# EAGLE board Car.job (EAGLE 6.1)
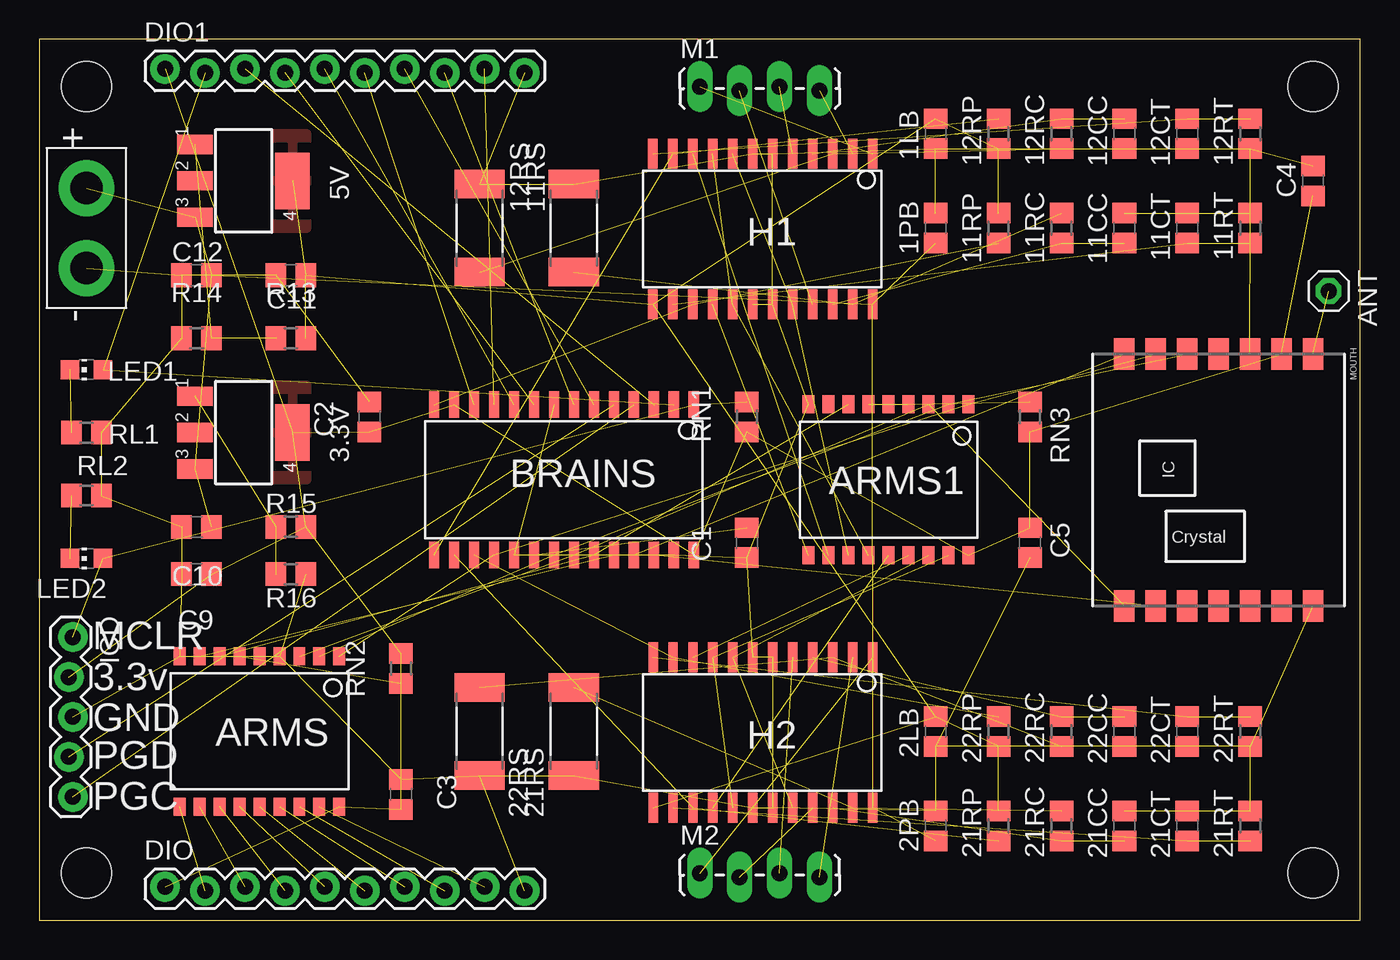
[diagram p0: board, top side]

Size 84 x 56 mm. Coordinates in mm from the lower left corner, seen from the top.
Outline: 0,0 84,0 84,56 0,56 0,0
Copper layers (1*16): Top 0.035mm / dielectric 1.5mm / Bottom 0.035mm
Design rules: minimum track width 8mil, minimum drill 20mil, track to track 10mil, track to pad 10mil, pad to pad 10mil, via to via 10mil, smd to smd 10mil, copper to edge 10mil, drill to drill 8mil, minimum pad ring 12mil, minimum via ring 10mil, stop-mask expansion 3mil, vias tented up to drill 25mil, thermal gap 25mil
Net classes: 1 power: width 0.508 mm, clearance 0.254 mm
Holes 3.2 mm at 3,53 3,3 81,53 81,3
tRestrict: area 11.2,43.4 to 14.8,50.6; area 11.2,27.4 to 14.8,34.6
vRestrict: area 67,20 to 83,36; area 11,28 to 17,34; area 11,44 to 17,50

## Footprints (pad centres in the part's own frame; a part is rotated, then mirrored left to right if it is on the bottom)
C0805 = smd 1.3 x 1.5: 1 -0.95,0; 2 0.95,0
SOT223 = smd 1.219 x 2.235: 1 -2.311,-3.099; 2 0,-3.099; 3 2.311,-3.099 | smd 3.6 x 2.2: 4 0,3.099
R0805 = smd 1.3 x 1.5: 1 -0.95,0; 2 0.95,0
R2512 = smd 1.8 x 3.2: 1 -2.8,0; 2 2.8,0
1X01 = drill 1.016 octagon: 1 0,0
SO-18W = smd 0.762 x 1.143: 1 -5.08,-4.788; 2 -3.81,-4.788; 3 -2.54,-4.788; 4 -1.27,-4.788; 5 0,-4.788; 6 1.27,-4.788; 7 2.54,-4.788; 8 3.81,-4.788; 9 5.08,-4.788; 10 5.08,4.788; 11 3.81,4.788; 12 2.54,4.788; 13 1.27,4.788; 14 0,4.788; 15 -1.27,4.788; 16 -2.54,4.788; 17 -3.81,4.788; 18 -5.08,4.788
SO28W = smd 0.65 x 1.7: 1 -7.62,-4.78; 2 -6.35,-4.78; 3 -5.08,-4.78; 4 -3.81,-4.78; 5 -2.54,-4.78; 6 -1.27,-4.78; 7 0,-4.78; 8 1.27,-4.78; 9 2.54,-4.78; 10 3.81,-4.78; 11 5.08,-4.78; 12 6.35,-4.78; 13 7.62,-4.78; 14 8.89,-4.78; 15 8.89,4.78; 16 7.62,4.78; 17 6.35,4.78; 18 5.08,4.78; 19 3.81,4.78; 20 2.54,4.78; 21 1.27,4.78; 22 0,4.78; 23 -1.27,4.78; 24 -2.54,4.78; 25 -3.81,4.78; 26 -5.08,4.78; 27 -6.35,4.78; 28 -7.62,4.78
1X10_LOCK = drill 1.016 pad 1.88: 1 0,0.127; 2 2.54,-0.127; 3 5.08,0.127; 4 7.62,-0.127; 5 10.16,0.127; 6 12.7,-0.127; 7 15.24,0.127; 8 17.78,-0.127; 9 20.32,0.127; 10 22.86,-0.127
SOP24L = smd 0.6 x 1.9: 1 -6.986,-4.717; 2 -5.716,-4.717; 3 -4.446,-4.717; 4 -3.176,-4.717; 5 -1.906,-4.717; 6 -0.636,-4.717; 7 0.634,-4.717; 8 1.904,-4.717; 9 3.174,-4.717; 10 4.444,-4.717; 11 5.714,-4.717; 12 6.984,-4.717; 13 6.984,4.843; 14 5.714,4.843; 15 4.444,4.843; 16 3.174,4.843; 17 1.904,4.843; 18 0.634,4.843; 19 -0.636,4.843; 20 -1.906,4.843; 21 -3.176,4.843; 22 -4.446,4.843; 23 -5.716,4.843; 24 -6.986,4.843
1X05_LOCK = drill 1.016 pad 1.88: 1 0,0.127; 2 2.54,-0.127; 3 5.08,0.127; 4 7.62,-0.127; 5 10.16,0.127
CHIP-LED0805 = smd 1.2 x 1.2: A 0,-1.05; C 0,1.05
1X04_LOCK_LONGPADS = drill 1.016 long: 1 0,0; 2 2.54,-0.254; 3 5.08,0; 4 7.62,-0.254
RFM12-XXX-S2 = smd 2 x 1.3: 1 -8.01,6.01; 2 -8.01,4.01; 3 -8.01,2.01; 4 -8.01,0.01; 5 -8.01,-1.99; 6 -8.01,-3.99; 7 -8.01,-5.99; 8 7.99,-5.99; 9 7.99,-3.99; 10 7.99,-1.99; 11 7.99,0.01; 12 7.99,2.01; 13 7.99,4.01; 14 7.99,6.01
1X02_XTRA_BIG = drill 2.057 pad 3.556: 1 -2.54,0; 2 2.54,0

## Placement (x,y rotation side)
1LB  100n  [C0805]  57,50 270 top
1PB  100u  [C0805]  57,44 90 top
2LB  100n  [C0805]  57,12 270 top
2PB  100u  [C0805]  57,6 90 top
3.3V  317EMP  [SOT223]  13,31 270 top
5V  317EMP  [SOT223]  13,47 270 top
11CC  820p  [C0805]  69,44 90 top
11CT  820p  [C0805]  73,44 90 top
11RC  1k  [R0805]  65,44 90 top
11RP  10k  [R0805]  61,44 90 top
11RS  1  [R2512]  34,44 270 top
11RT  56k  [R0805]  77,44 270 top
12CC  820p  [C0805]  69,50 270 top
12CT  820p  [C0805]  73,50 270 top
12RC  1k  [R0805]  65,50 90 top
12RP  10k  [R0805]  61,50 270 top
12RS  1  [R2512]  28,44 270 top
12RT  56k  [R0805]  77,50 90 top
21CC  820p  [C0805]  69,6 90 top
21CT  820p  [C0805]  73,6 90 top
21RC  1k  [R0805]  65,6 270 top
21RP  10k  [R0805]  61,6 90 top
21RS  1  [R2512]  34,12 90 top
21RT  56k  [R0805]  77,6 270 top
22CC  820p  [C0805]  69,12 270 top
22CT  820p  [C0805]  73,12 270 top
22RC  1k  [R0805]  65,12 270 top
22RP  10k  [R0805]  61,12 270 top
22RS  1  [R2512]  28,12 90 top
22RT  56k  [R0805]  77,12 90 top
ANT  [1X01]  82,40 270 top
ARMS  MCP23S08  [SO-18W]  14,12 180 top
ARMS1  MCP23S08  [SO-18W]  54,28 180 top
BRAINS  PIC24HJXXGP502  [SO28W]  34,28 180 top
C1  10u  [C0805]  45,24 270 top
C2  100n  [C0805]  21,32 90 top
C3  100n  [C0805]  23,8 90 top
C4  100n  [C0805]  81,47 90 top
C5  100n  [C0805]  63,24 270 top
C9  1u  [C0805]  10,22 180 top
C10  0.1u  [C0805]  10,25 180 top
C11  1u  [C0805]  16,41 180 top
C12  0.1u  [C0805]  10,41 180 top
DIO  [1X10_LOCK]  8,2 0 top
DIO1  [1X10_LOCK]  8,54 0 top
H1  MTS62C19A  [SOP24L]  46,44 180 top
H2  MTS62C19A  [SOP24L]  46.01,12 180 top
ICD  [1X05_LOCK]  2,18 270 top
LED1  [CHIP-LED0805]  3,35 90 top
LED2  [CHIP-LED0805]  3,23 90 top
M1  [1X04_LOCK_LONGPADS]  42,53 0 top
M2  [1X04_LOCK_LONGPADS]  42,3 0 top
MOUTH  RFM12  [RFM12-XXX-S2]  75,28 90 top
POW  [1X02_XTRA_BIG]  3,44 270 top
R13  240  [R0805]  16,37 0 top
R14  715  [R0805]  10,37 0 top
R15  240  [R0805]  16,25 0 top
R16  390  [R0805]  16,22 180 top
RL1  1k  [R0805]  3,31 0 top
RL2  1k  [R0805]  3,27 0 top
RN1  10k  [R0805]  45,32 90 top
RN2  10k  [R0805]  23,16 90 top
RN3  10k  [R0805]  63,32 270 top

## Library data of the parts
1LB 1PB 2LB 2PB 11CC 11CT 11RC 11RP 11RT 12CC 12CT 12RC 12RP 12RT 21CC 21CT 21RC 21RP 21RT 22CC 22CT 22RC 22RP 22RT C1-C5 C9-C12 R13-R16 RL1 RL2 RN1-RN3 = rcl
3.3V 5V = linear
11RS 12RS 21RS 22RS = resistor
ANT = pinhead
ARMS ARMS1 BRAINS H1 H2 = microchip
DIO DIO1 ICD M1 M2 POW = SparkFun-Connectors
LED1 LED2 = led
MOUTH = SparkFun-RF

## Nets
+3V3 [power]: 3.3V.4 ARMS1.18 ARMS.18 BRAINS.13 BRAINS.28 C2.1 C3.1 C4.1 C5.1 C9.1 DIO1.1 DIO.1 ICD.2 MOUTH.9 R15.2 RN1.1 RN2.2 RN3.2
+5V [power]: 1LB.1 2LB.1 5V.4 11RP.2 12RP.2 21RP.2 22RP.2 C11.1 H1.13 H2.13 R13.2
+12V [power]: 1PB.1 2PB.1 3.3V.3 5V.3 C10.1 C12.1 H1.24 H2.24 POW.1
GND [power]: 1LB.2 1PB.2 2LB.2 2PB.2 11CC.2 11CT.2 11RS.1 11RT.1 12CC.2 12CT.2 12RS.1 12RT.1 21CC.2 21CT.2 21RS.1 21RT.1 22CC.2 22CT.2 22RS.1 22RT.1 ARMS1.9 ARMS.4 ARMS.5 ARMS.9 BRAINS.8 BRAINS.19 BRAINS.27 C1.2 C2.2 C3.2 C4.2 C5.2 C9.2 C10.2 C11.2 C12.2 DIO1.10 DIO.10 H1.6 H1.7 H1.18 H1.19 H2.6 H2.7 H2.18 H2.19 ICD.3 MOUTH.7 MOUTH.10 POW.2 R14.1 R16.1 RL1.2 RL2.2
N$1 [power]: H1.21 M1.2
N$2 [power]: H1.1 M1.1
N$3: BRAINS.4 ICD.5
N$4 [power]: H1.5 M1.3
N$5 [power]: H1.2 M1.4
N$6 [power]: H2.21 M2.2
N$7: ARMS1.1 ARMS.1 BRAINS.18 MOUTH.13
N$8 [power]: H2.1 M2.1
N$9 [power]: H2.5 M2.3
N$10 [power]: H2.2 M2.4
N$11: BRAINS.1 ICD.1 LED2.A RN1.2
N$12: ARMS.16 DIO.8
N$13 [power]: 21RC.1 21RS.2 H2.23
N$14: 21CC.1 21RC.2 H2.22
N$15: 22CT.1 22RT.2 H2.12
N$16 [power]: 22RC.2 22RS.2 H2.3
N$17: 22CC.1 22RC.1 H2.4
N$18: 21CT.1 21RT.2 H2.14
N$19: 22RP.1 BRAINS.17 H2.11
N$20: 3.3V.1 R15.1 R16.2
N$21: 12RP.1 BRAINS.15 H1.11
N$22: BRAINS.25 MOUTH.14
N$23 [power]: ARMS1.12 H1.8 H1.20
N$24: BRAINS.26 MOUTH.2
N$25: ARMS1.2 ARMS.2 BRAINS.21 MOUTH.12
N$26: ARMS1.3 ARMS.3 BRAINS.22 MOUTH.1
N$27: 5V.1 R13.1 R14.2
N$28: BRAINS.5 ICD.4
N$29: BRAINS.9 DIO1.4
N$30: 11RP.1 BRAINS.14 H1.15
N$31 [power]: 11RC.2 11RS.2 H1.23
N$32: BRAINS.10 DIO1.5
N$33: 11CC.1 11RC.1 H1.22
N$34: 12CC.1 12RC.2 H1.4
N$35 [power]: 12RC.1 12RS.2 H1.3
N$36: ARMS1.7 ARMS.7 BRAINS.23
N$37: ARMS.8 BRAINS.24
N$38: 21RP.1 BRAINS.16 H2.15
N$39 [power]: ANT.1 MOUTH.8
N$40: BRAINS.20 C1.1
N$41: 11CT.1 11RT.2 H1.14
N$42: 12CT.1 12RT.2 H1.12
N$43: ARMS.10 DIO.2
N$44: ARMS.11 DIO.3
N$45: BRAINS.2 DIO1.2 LED1.A
N$46: LED1.C RL1.1
N$47: ARMS1.4 ARMS1.5 ARMS1.6 RN3.1
N$48: ARMS.12 DIO.4
N$49: ARMS.13 DIO.5
N$50: ARMS.14 DIO.6
N$51: ARMS.15 DIO.7
N$52: ARMS.17 DIO.9
N$53: BRAINS.3 DIO1.3
N$54: BRAINS.6 DIO1.7
N$55: BRAINS.7 DIO1.8
N$56 [power]: ARMS1.13 H1.9 H1.17
N$57: BRAINS.12 DIO1.6
N$58: ARMS.6 RN2.1
N$59: BRAINS.11 DIO1.9
N$60 [power]: ARMS1.16 H2.8 H2.20
N$61 [power]: ARMS1.17 H2.9 H2.17
N$62: ARMS1.10 H1.16
N$63: ARMS1.11 H1.10
N$65: LED2.C RL2.1
N$66: ARMS1.14 H2.16
N$67: ARMS1.15 H2.10

## Tracks (layer width: path | path; a pad name or v marks a point on that pad's centre or on a via)
+3V3  (17 unrouted)
  pour Top: 13,34 13,28 17,28 17,34
+5V  (10 unrouted)
  pour Top: 13,50 13,44 17,44 17,50
+12V  (8 unrouted)
GND  (53 unrouted)
N$1  (1 unrouted)
N$2  (1 unrouted)
N$3  (1 unrouted)
N$4  (1 unrouted)
N$5  (1 unrouted)
N$6  (1 unrouted)
N$7  (3 unrouted)
N$8  (1 unrouted)
N$9  (1 unrouted)
N$10  (1 unrouted)
N$11  (3 unrouted)
N$12  (1 unrouted)
N$13  (2 unrouted)
N$14  (2 unrouted)
N$15  (2 unrouted)
N$16  (2 unrouted)
N$17  (2 unrouted)
N$18  (2 unrouted)
N$19  (2 unrouted)
N$20  (2 unrouted)
N$21  (2 unrouted)
N$22  (1 unrouted)
N$23  (2 unrouted)
N$24  (1 unrouted)
N$25  (3 unrouted)
N$26  (3 unrouted)
N$27  (2 unrouted)
N$28  (1 unrouted)
N$29  (1 unrouted)
N$30  (2 unrouted)
N$31  (2 unrouted)
N$32  (1 unrouted)
N$33  (2 unrouted)
N$34  (2 unrouted)
N$35  (2 unrouted)
N$36  (2 unrouted)
N$37  (1 unrouted)
N$38  (2 unrouted)
N$39  (1 unrouted)
N$40  (1 unrouted)
N$41  (2 unrouted)
N$42  (2 unrouted)
N$43  (1 unrouted)
N$44  (1 unrouted)
N$45  (2 unrouted)
N$46  (1 unrouted)
N$47  (3 unrouted)
N$48  (1 unrouted)
N$49  (1 unrouted)
N$50  (1 unrouted)
N$51  (1 unrouted)
N$52  (1 unrouted)
N$53  (1 unrouted)
N$54  (1 unrouted)
N$55  (1 unrouted)
N$56  (2 unrouted)
N$57  (1 unrouted)
N$58  (1 unrouted)
N$59  (1 unrouted)
N$60  (2 unrouted)
N$61  (2 unrouted)
N$62  (1 unrouted)
N$63  (1 unrouted)
N$65  (1 unrouted)
N$66  (1 unrouted)
N$67  (1 unrouted)

## Text on the board
tPlace: + | -
_tsilk: MCLR | 3.3v | GND | PGD | PGC